# EAGLE board Passive Attn PANEL (EAGLE 7.7.0)
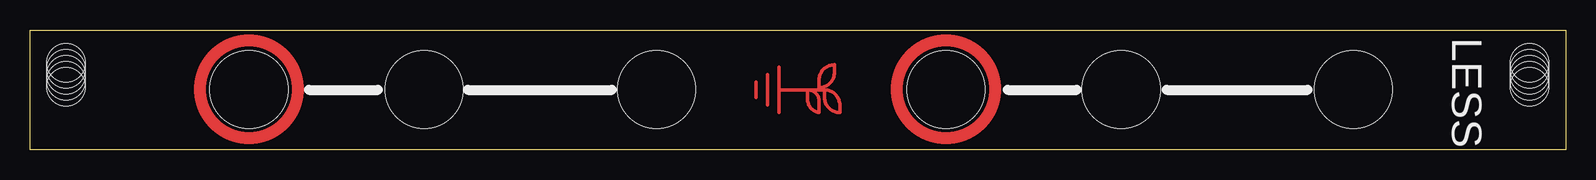
[diagram p0: board, top side]
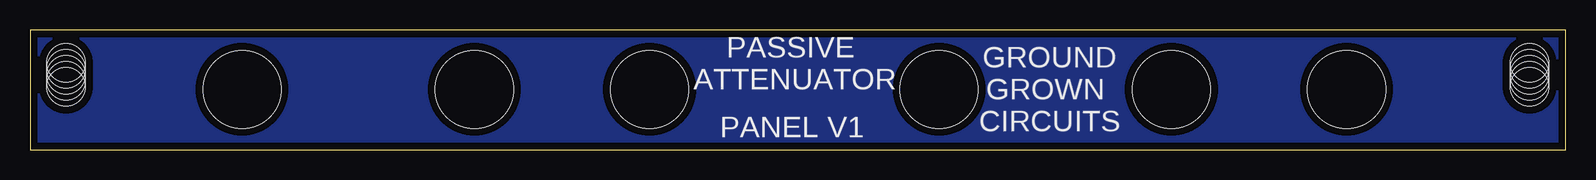
[diagram p1: board, bottom side, seen from below]

Size 128 x 10 mm. Coordinates in mm from the lower left corner, seen from the top.
Outline: 0,0 0,10 128,10 128,0 0,0
Copper layers (1*16): Top 0.035mm / dielectric 1.5mm / Bottom 0.035mm
Design rules "SparkFun": minimum track width 8mil, minimum drill 20mil, track to track 8mil, track to pad 8mil, pad to pad 8mil, via to via 8mil, smd to smd 8mil, copper to edge 8mil, drill to drill 8mil, minimum pad ring 12mil, minimum via ring 10mil, stop-mask expansion 4mil, vias tented up to drill 20mil, thermal gap 10mil
Holes 3.2 mm at 3,5.25 3,5.75 3,6.25 3,6.75 3,7.25 125,5.25 125,5.75 125,6.25 125,6.75 125,7.25

## Footprints (pad centres in the part's own frame; a part is rotated, then mirrored left to right if it is on the bottom)
JACK_DRILL = hole 6.5: 0,0
JACK_DRILL_COPPER_EXS = hole 6.5: 0,0

## Placement (x,y rotation side)
E$1  [LOGO_SMALL_COPPER]  62.5,5 270 top
I1  WQP-PJ301M-12_JACK  [JACK_DRILL]  90.95,5.03 270 top
I2  WQP-PJ301M-12_JACK  [JACK_DRILL]  32.85,5.03 270 top
O1  WQP-PJ301M-12_JACK  [JACK_DRILL_COPPER_EXS]  76.35,5.03 270 top
O2  WQP-PJ301M-12_JACK  [JACK_DRILL_COPPER_EXS]  18.25,5.03 270 top
RV1  [JACK_DRILL]  110.32,5.03 180 top
RV2  [JACK_DRILL]  52.22,5.03 180 top

## Library data of the parts
E$1 I1 I2 O1 O2 RV1 RV2 = GroundGrownCircuits

## Tracks (layer width: path | path; a pad name or v marks a point on that pad's centre or on a via)
S$1
  pour Bottom (isolate 0.61): 0,0 128,0 128,10 0,10

## Text on the board
tPlace: LESS
bPlace: PASSIVE / ATTENUATOR | GROUND / GROWN / CIRCUITS | PANEL V1